# Altium PCB PCB.PcbDoc (part 1 of 2)
Units mm, origin at the board's own origin, x right, y up, seen from the top; angles counter-clockwise.
Board outline 51.3 x 20.05 mm, 4 copper layers (Top Layer, Power Layer, GND Layer, Bottom Layer), stack 1.536 mm thick; 81 components, 59 nets, 315 pads, 114 vias.
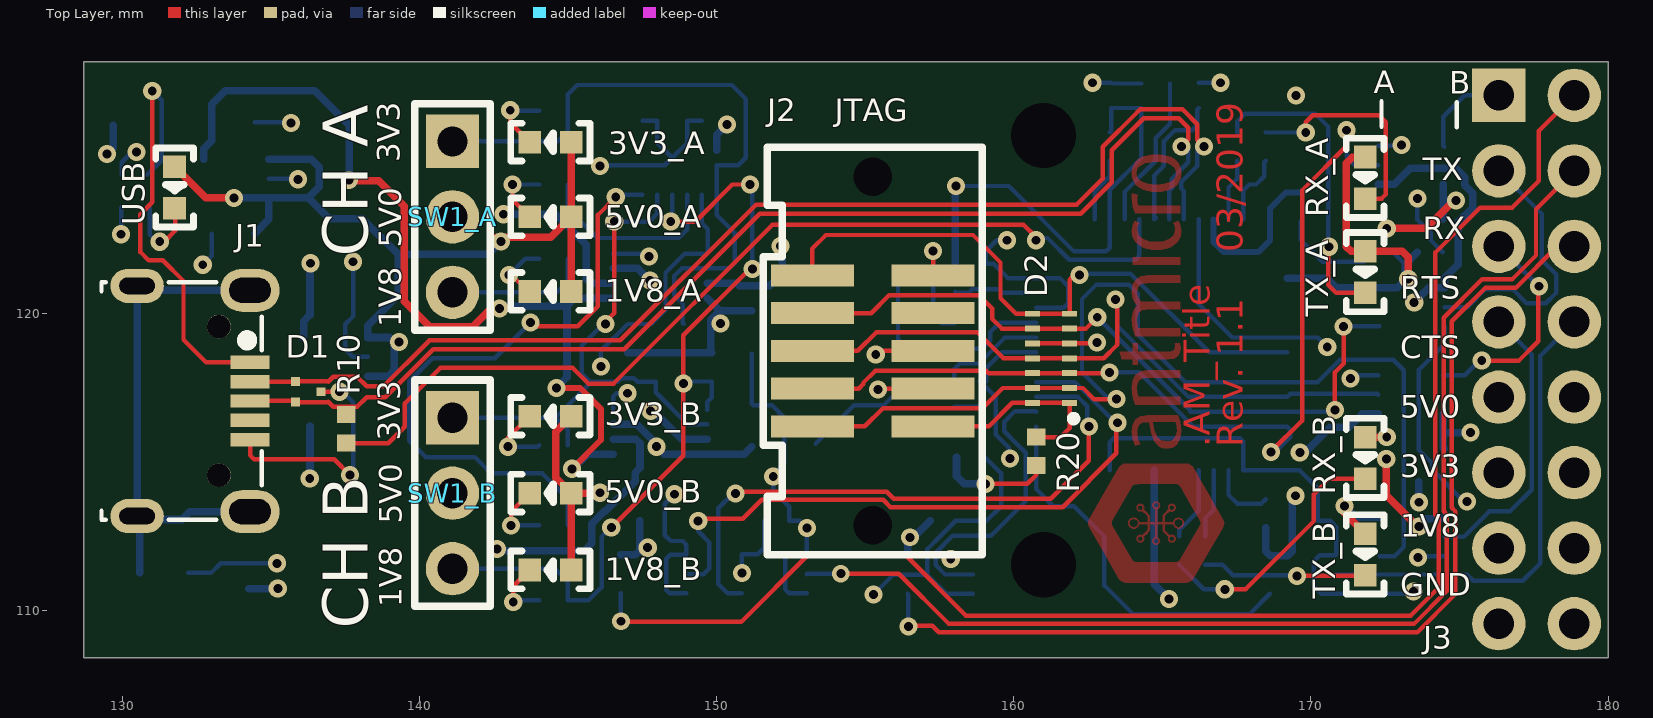
[diagram p0: Top Layer view]
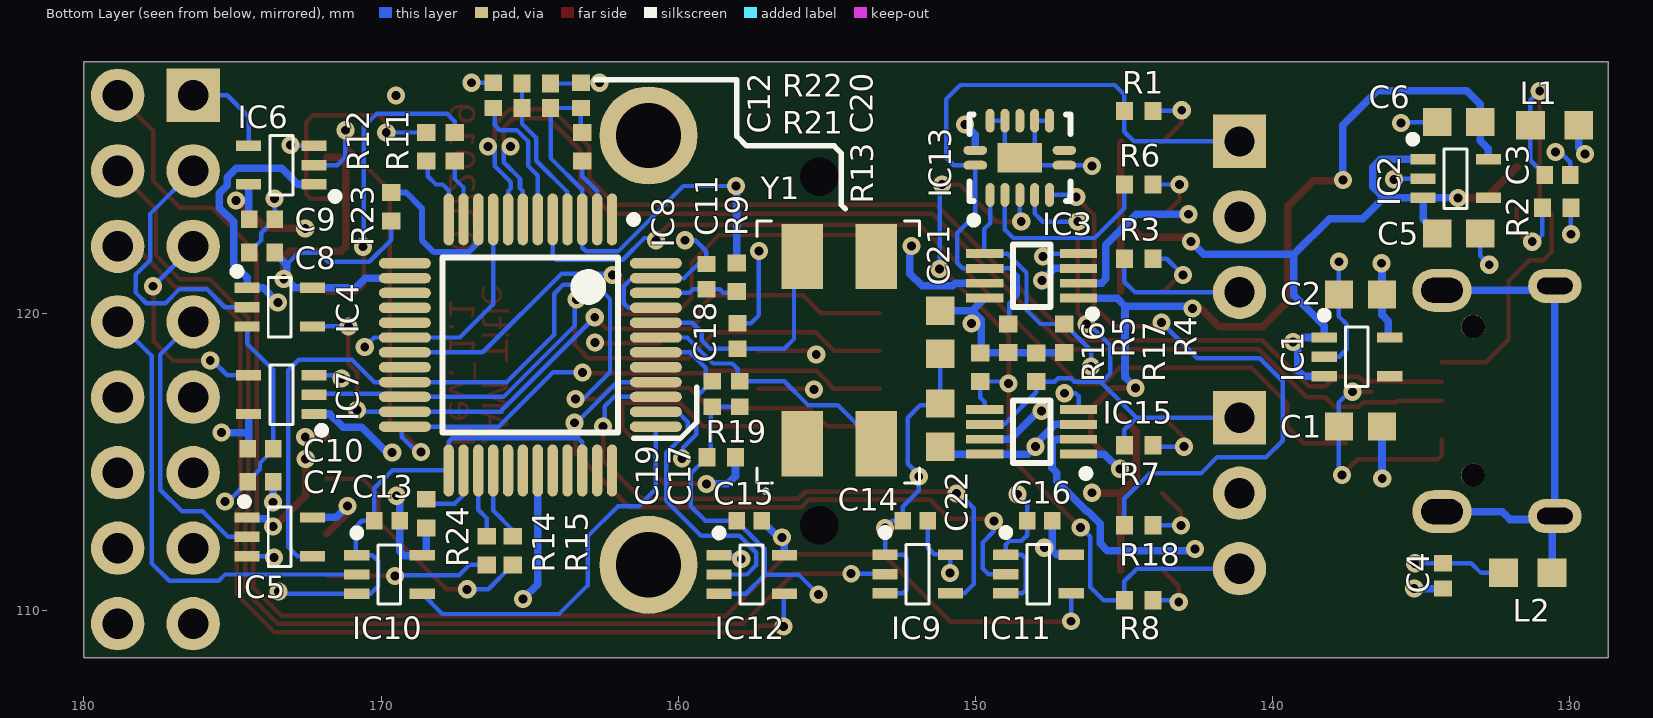
[diagram p1: Bottom Layer view, seen from below]
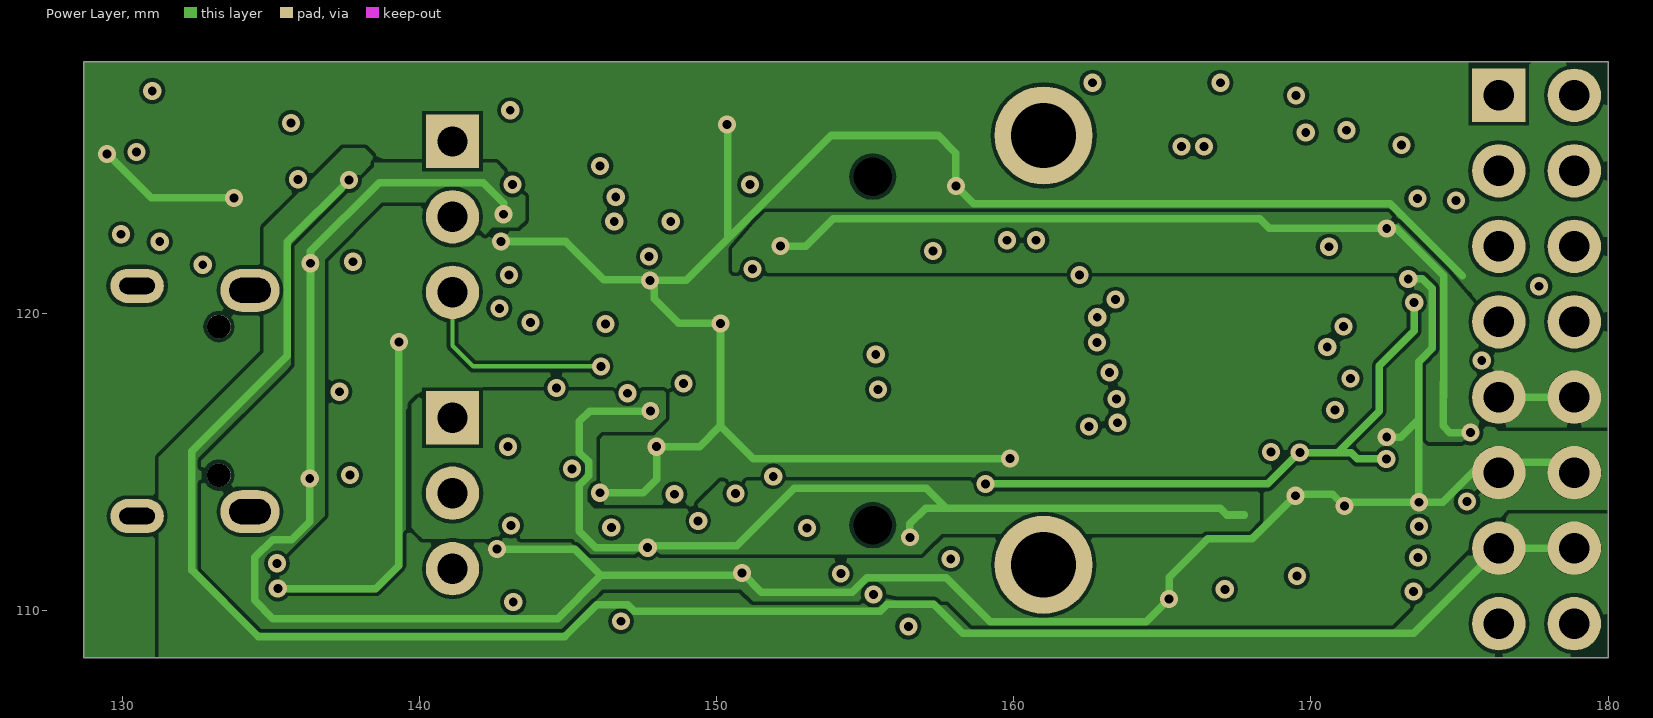
[diagram p2: Power Layer]
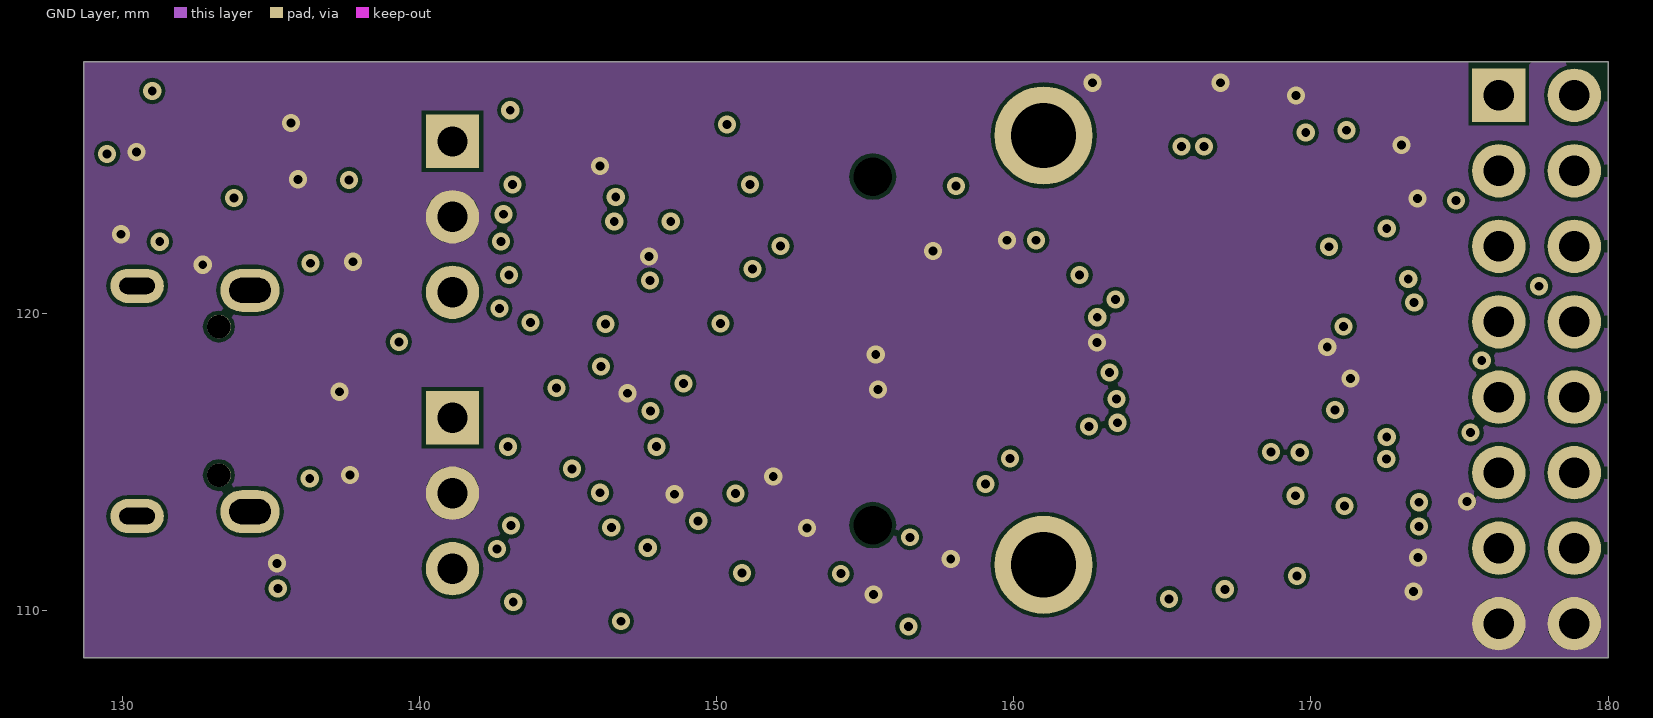
[diagram p3: GND Layer]
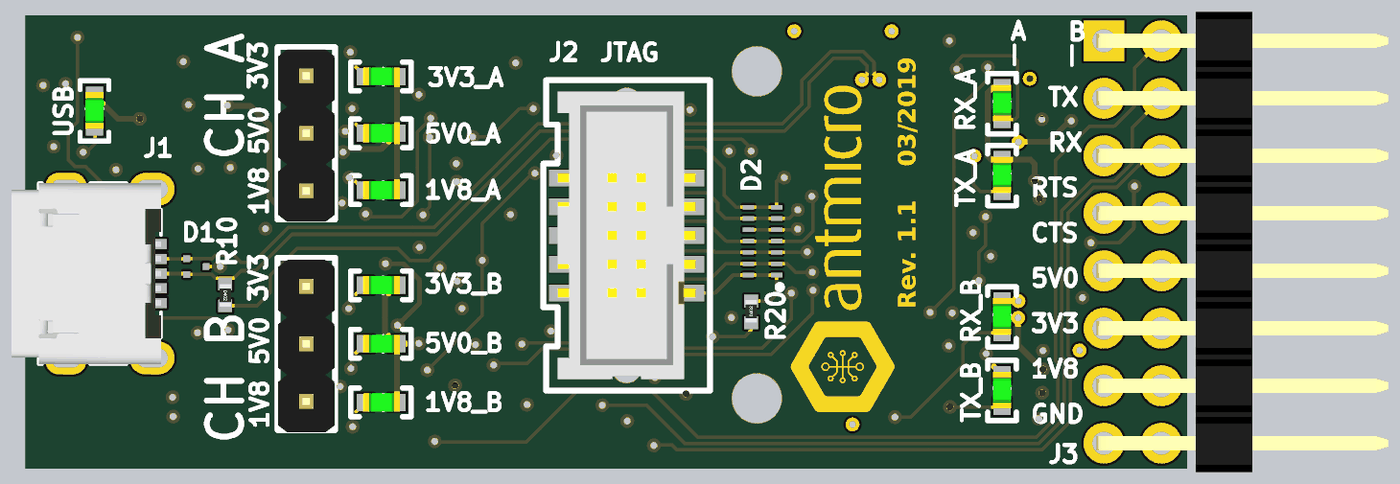
[diagram p5: 3D render of the assembled board from above, using the file's embedded part models]
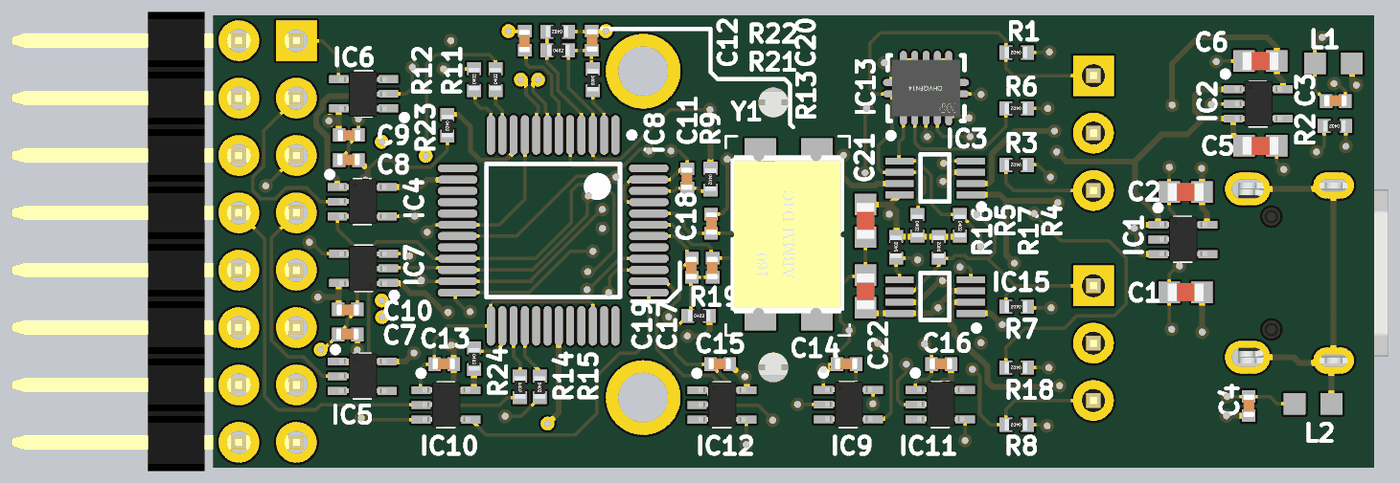
[diagram p6: 3D render of the assembled board from below, using the file's embedded part models]

## Layer stack, top to bottom
Top Solder: solder mask 0.01, Solder Resist, Dk 3.5
Top Layer: signal copper 0.035
Dielectric 1: prepreg 0.36, 7628MR, Dk 4.6
Power Layer: signal copper 0.018
Dielectric 2: core 0.71, FR+4, Dk 4.3
GND Layer: signal copper 0.018
Dielectric 3: prepreg 0.36, 7628MR, Dk 4.6
Bottom Layer: signal copper 0.035
Bottom Solder: solder mask 0.01, Solder Resist, Dk 3.5

## Board outline
128.7,108.425 180,108.425 180,128.475 128.7,128.475

## Design rules (kind name [scope] priority, off if disabled: settings)
Clearance [All] p1: gap=0.127
DiffPairsRouting [All] p1: maxlimit=0.152 minlimit=0.152 mostfreqgap=0.152 toplayer_minwidth=0.152 toplayer_maxwidth=0.152 toplayer_prefwidth=0.152 midlayer1_minwidth=0.152 midlayer1_maxwidth=0.152 midlayer1_prefwidth=0.152 midlayer2_minwidth=0.152 midlayer2_maxwidth=0.152 midlayer2_prefwidth=0.152 bottomlayer_minwidth=0.152 bottomlayer_maxwidth=0.152 bottomlayer_prefwidth=0.152 maxuncoupledlength=12.7
HoleSize [All] p1: absolutevalues=TRUE maxlimit=3.81 minlimit=0.25 maxpercent=80.000 minpercent=20.000
MinimumAnnularRing [All] p1: minimumring=0.15
MinimumSolderMaskSliver [All] p1: minsoldermaskwidth=0
PlaneClearance [All] p1: clearance=0.254
PlaneConnect [All] p1: planeconnectstyle=Direct reliefexpansion=0.508 reliefentries=4 reliefconductorwidth=0.254 reliefairgap=0.254
PolygonConnect [All] p1: connectstyle=Relief reliefconductorwidth=0.5 reliefentries=4 polygonreliefangle="90 Angle" airgapwidth=0
RoutingVias [All] p1: holewidth=0.3 width=0.61 viastyle="Through Hole" minholewidth=0.3 minwidth=0.61 maxholewidth=0.3 maxwidth=0.61
SilkToSilkClearance [All] p1: silktosilkclearance=0
SilkToSolderMaskClearance [IsPad] p1: minsilkscreentomaskgap=0 clearancetoexposedcopper=TRUE
SolderMaskExpansion ViaTenting [isVia] p1: expansion=-0.3
SolderMaskExpansion [All] p2: expansion=0.102
Width [All] p1: maxlimit=2 minlimit=0.15 preferedwidth=0.203
22 further rules are at their usual default settings.

## Classes and differential pairs
differential pair USB_D: +USB_D_P -USB_D_N

## Components (designator, comment, footprint, x,y, rotation, side; value= is the part's Value field where it differs from the comment)
1V8_A "KPT-1608SGC" LED0603 144.4,120.75 r180 top
1V8_B "KPT-1608SGC" LED0603 144.4,111.375 r180 top
3V3_A "KPT-1608SGC" LED0603 144.4,125.775 r180 top
3V3_B "KPT-1608SGC" LED0603 144.4,116.55 r180 top
5V0_A "KPT-1608SGC" LED0603 144.4,123.262 r180 top
5V0_B "KPT-1608SGC" LED0603 144.4,113.963 r180 top
C1 "1u" 0603#1 137.033,116.209 r180 bottom
C2 "1u" 0603#1 137.033,120.65 r180 bottom
C3 "10n" 0402#1 130.4,124.675 r180 bottom
C4 "100n" 0402#1 134.25,111.175 r270 bottom
C5 "1u" 0603#1 133.725,122.7 r0 bottom
C6 "1u" 0603#1 133.725,126.45 r180 bottom
C7 "100n" 0402#1 174.058,114.343 r180 bottom
C8 "100n" 0402#1 174.008,122.063 r180 bottom
C9 "100n" 0402#1 174.008,123.178 r0 bottom
C10 "100n" 0402#1 174.058,115.458 r0 bottom
C11 "100n" 0402#1 159.05,121.25 r90 bottom
C12 "100n" 0402#1 166.225,127.35 r90 bottom
C13 "100n" 0402#1 169.799,113.03 r180 bottom
C14 "100n" 0402#1 152.019,113.03 r180 bottom
C15 "100n" 0402#1 157.607,113.03 r180 bottom
C16 "100n" 0402#1 147.828,113.03 r180 bottom
C17 "27p" 0402#1 157.925,117.3 r90 bottom
C18 "27p" 0402#1 158,119.25 r270 bottom
C19 "100n" 0402#1 158.85,117.3 r90 bottom
C20 "100n" 0402#1 163.275,127.35 r270 bottom
C21 "100n" 0603#1 151.175,119.375 r90 bottom
C22 "100n" 0603#1 151.175,116.25 r270 bottom
D1 "TPD2E009DRTR" SOT-3 136.25,117.375 r270 top
D2 "TPD6E05U06" TPD6E05U06_PASS 161.25,118.5 r90 top
IC1 "TLV70033DCKT" SC70-5 138.25,119.2 r180 bottom
IC2 "TLV70018DCKT" SC70-5 134.925,125.2 r180 bottom
IC3 "TS5A3359" TS5A3359 148.1,121.275 r0 bottom
IC4 "SN74LV1T125DCKR" SC70-5 174.508,120.871 r180 bottom
IC5 "SN74LV1T125DCKR" SC70-5 174.508,113.143 r180 bottom
IC6 "SN74LV1T125DCKR" SC70-5 172.258,124.353 r0 bottom
IC7 "SN74LV1T125DCKR" SC70-5 172.258,116.625 r0 bottom
IC8 "FT2232D" LQFP-48 164.975,118.95 r270 bottom
IC9 "SN74LV1T125DCKR" SC70-5 153.035,111.887 r180 bottom
IC10 "SN74LV1T125DCKR" SC70-5 170.815,111.873 r180 bottom
IC11 "SN74LV1T125DCKR" SC70-5 148.971,111.887 r180 bottom
IC12 "SN74LV1T125DCKR" SC70-5 158.623,111.873 r180 bottom
IC13 "74HC00BQ" DHVQFN14 148.5,125.25 r90 bottom
IC15 "TS5A3359" TS5A3359 148.1,116.025 r0 bottom
J1 "629105150521" WE_629105150521 131.39,117.064 r270 top
J2 "SHF-105-01-L-D-SM" SHF-105-01-X-D-SM 155.25,118.75 r90 top
J3 "MH_2X08_2.54_RA" MH_2X08_2.54_RA 176.325,127.35 r270 top
L1 "BLM18SG121TN1D" 0603#2 130.5,126.35 r0 bottom
L2 "BLM18SG121TN1D" 0603#2 131.4,111.275 r180 bottom
R1 "220R" 0402#2 144.5,126.825 r0 bottom
R2 "470R" 0402#2 130.429,123.571 r0 bottom
R3 "220R" 0402#2 144.5,121.85 r0 bottom
R4 "10k" 0402#2 147,119.175 r270 bottom
R5 "10k" 0402#2 148.883,119.175 r270 bottom
R6 "220R" 0402#2 144.5,124.35 r0 bottom
R7 "220R" 0402#2 144.5,115.575 r0 bottom
R8 "220R" 0402#2 144.5,110.35 r0 bottom
R9 "470R" 0402#2 158.025,121.225 r270 bottom
R10 "1k54" 0402#2 137.525,116.125 r270 top
R11 "220R" 0402#2 167.525,125.625 r90 bottom
R12 "220R" 0402#2 168.475,125.625 r90 bottom
R13 "10k" 0402#2 163.225,125.625 r270 bottom
R14 "220R" 0402#2 166.448,112.03 r270 bottom
R15 "220R" 0402#2 165.573,112.03 r270 bottom
R16 "10k" 0402#2 149.825,118.2 r90 bottom
R17 "10k" 0402#2 147.942,118.2 r90 bottom
R18 "220R" 0402#2 144.5,112.875 r0 bottom
R19 "10k" 0402#2 158.55,115.175 r180 bottom
R20 "0R" 0402#2 160.75,115.375 r90 top
R21 "4k7" 0402#2 164.775,126.925 r180 bottom
R22 "10k" 0402#2 164.775,127.75 r0 bottom
R23 "0R" 0402#2 169.65,123.6 r270 bottom
R24 "0R" 0402#2 168.475,113.275 r270 bottom
RX_A "KPT-1608SGC" LED0603 171.825,124.575 r270 top
RX_B "KPT-1608SGC" LED0603 171.825,115.15 r270 top
SW1_A "MH_1X03_2.54" MH_1X03_2.54 141.105,125.8 r270 top
SW1_B "MH_1X03_2.54" MH_1X03_2.54 141.105,116.5 r270 top
TX_A "KPT-1608SGC" LED0603 171.825,121.4 r270 top
TX_B "KPT-1608SGC" LED0603 171.825,111.9 r270 top
USB "KPT-1608SGC" LED0603 131.75,124.25 r270 top
Y1 "MQ-6.000-12-30/30/" Crystal_5x7mm 155.825,115.625 r90 bottom

## Footprints (in the part's own frame and the unit in brackets; to place one, negate y for a bottom-side part, rotate by r counter-clockwise, add the part's x,y. Pads: shape width x height; smd on the part's side, far side on the other; paste and mask are expansions set on the pad)
0402#1 [mm]
  rect 0.55x0.6 smd: 1(-0.425,0) 2(0.425,0)
  body extent -0.51,-0.23 0.5,0.27, height 0.49
0402#2 [mm]
  rect 0.57x0.62 smd: 1(-0.48,0) 2(0.48,0)
  body extent -0.47,-0.25 0.53,0.25, height 0.35
0603#1 [mm]
  rect 0.95x0.95 smd: 1(-0.725,0) 2(0.725,0)
  body extent -0.8,-0.4 0.8,0.4, height 0.45
0603#2 [mm] "Chip Inductor Ferrite Bead 0603"
  rect 0.97x0.96 smd: 1(-0.815,0) 2(0.815,0)
  body extent -0.87,-0.48 0.87,0.47, height 0.6
Crystal_5x7mm [mm]
  rect 2.2x1.4 smd: 1(0,-2.5) 2(6.3,-2.5) 3(6.3,0) 4(0,0)
  silkscreen extent -1.67,-3.95 7.5,1.53, body extent -0.35,-3.7 6.65,1.3, height 1.45
DHVQFN14 [mm] "QFN, 14-Leads, Body 2.50x3.00mm, Pitch 0.50mm, Thermal Pad 1.00x1.50mm, IPC Medium Density"
  oval 0.3x0.8 smd: 1(-0.25,1.5) 7(-0.25,-1.5) 8(0.25,-1.5) 14(0.25,1.5)
  oval 0.8x0.3 smd: 2(-1.25,1) 3(-1.25,0.5) 4(-1.25,0) 5(-1.25,-0.5) 6(-1.25,-1) 9(1.25,-1) 10(1.25,-0.5) 11(1.25,0) 12(1.25,0.5) 13(1.25,1)
  rect 1x1.5 smd: 15(0,0)
  silkscreen extent -2.22,-1.7 1.45,1.7, body extent -1.25,-1.5 1.25,1.5, height 0.85
LED0603 [mil]
  rect 30x30 smd: A(-27.5,0) K(27.5,0)
  silkscreen extent -52,-25 52,25, body extent -33,-16 31,16, height 43
LQFP-48 [mm] "LQFP-48, 48-Leads, Body 7.25x7.25mm, Pitch 0.50mm, IPC Medium Density"
  oval 1.75x0.35 smd: 1(-4.225,2.75) 2(-4.225,2.25) 3(-4.225,1.75) 4(-4.225,1.25) 5(-4.225,0.75) 6(-4.225,0.25) 7(-4.225,-0.25) 8(-4.225,-0.75) 9(-4.225,-1.25) 10(-4.225,-1.75) 11(-4.225,-2.25) 12(-4.225,-2.75) 25(4.225,-2.75) 26(4.225,-2.25) 27(4.225,-1.75) 28(4.225,-1.25) 29(4.225,-0.75) 30(4.225,-0.25) 31(4.225,0.25) 32(4.225,0.75) 33(4.225,1.25) 34(4.225,1.75) 35(4.225,2.25) 36(4.225,2.75)
  oval 0.35x1.75 smd: 13(-2.75,-4.225) 14(-2.25,-4.225) 15(-1.75,-4.225) 16(-1.25,-4.225) 17(-0.75,-4.225) 18(-0.25,-4.225) 19(0.25,-4.225) 20(0.75,-4.225) 21(1.25,-4.225) 22(1.75,-4.225) 23(2.25,-4.225) 24(2.75,-4.225) 37(2.75,4.225) 38(2.25,4.225) 39(1.75,4.225) 40(1.25,4.225) 41(0.75,4.225) 42(0.25,4.225) 43(-0.25,4.225) 44(-0.75,4.225) 45(-1.25,4.225) 46(-1.75,4.225) 47(-2.25,4.225) 48(-2.75,4.225)
  silkscreen extent -4.35,-2.95 2.95,3.6, body extent -3.65,-3.65 3.65,3.65, height 1.6
MH_1X03_2.54 [mm]
  rect 1.8x1.8 hole 1.02: 1(0,0)
  round 1.8 hole 1.02: 2(2.54,0) 3(5.08,0)
  silkscreen extent -1.27,-1.27 6.35,1.27, body extent -1.17,-1.25 6.45,1.25, height 8.33
MH_2X08_2.54_RA [mm]
  rect 1.8x1.8 hole 1.02: 1(0,0)
  round 1.8 hole 1.02: 2(0,2.54) 3(2.54,0) 4(2.54,2.54) 5(5.08,0) 6(5.08,2.54) 7(7.62,0) 8(7.62,2.54) 9(10.16,0) 10(10.16,2.54) 11(12.7,0) 12(12.7,2.54) 13(15.24,0) 14(15.24,2.54) 15(17.78,0) 16(17.78,2.54)
  body extent -1.27,-0.32 19.05,12.56, height 2.45
SC70-5 [mm] "SC70, 5-Leads, Pitch 0,65mm, EIAJ SC-88a"
  rect 0.85x0.35 smd: 1(0,0) 2(0,-0.65) 3(0,-1.3) 4(2.2,-1.3) 5(2.2,0)
  silkscreen extent -0.13,-1.65 1.47,0.87, body extent 0.07,-1.63 2.17,0.37, height 0.96
SHF-105-01-X-D-SM [mil]
  round 0 hole 51.18: 0(-231,0) 0(230.98,0)
  rect 29x110 smd mask+2: 1(-100,-80) 2(-100,80) 3(-50,-80) 4(-50,80) 5(0,-80) 6(0,80) 7(50,-80) 8(50,80) 9(100,-80) 10(100,80)
  silkscreen extent -270,-145 270,145, body extent -250,-120 250,120, height 210
SOT-3 [mm]
  rect 0.3x0.3 smd: 1(-0.35,-0.425) 2(0.35,-0.425) 3(0,0.425)
  body extent -0.51,-0.38 0.51,0.38, height 0.51
TPD6E05U06_PASS [mm]
  rect 0.2x0.5 smd: 5(0.5,-0.625) 8(1.5,-0.625) 8(1.5,0.625) 9(1,-0.625) 9(1,0.625) 10(0.5,0.625) 11(0,0.625) 11(0,-0.625) 12(-0.5,-0.625) 12(-0.5,0.625) 13(-1,-0.625) 13(-1,0.625) 14(-1.5,-0.625) 14(-1.5,0.625)
  silkscreen extent -2.13,-0.86 -1.93,-0.66, body extent -1.88,-0.63 1.93,0.64, height 0.6
TS5A3359 [mm]
  rect 1.25x0.3 smd: 1(-1.579,0.75) 2(-1.579,0.25) 3(-1.579,-0.25) 4(-1.579,-0.75) 5(1.579,-0.75) 6(1.579,-0.25) 7(1.579,0.25) 8(1.579,0.75)
  silkscreen extent -2.17,-1.05 0.64,1.4, body extent -1.2,-1.05 1.2,1.05, height 0.9
WE_629105150521 [mm] "Micro USB 2.0 SMT Type B Horizontal 5 Contacts High Current"
  rect 0.45x1.3 smd: 1(-1.3,2.9) 2(-0.65,2.9) 3(0,2.9) 4(0.65,2.9) 5(1.3,2.9)
  oval 1.15x1.8 hole 0.55 slot 1.2 at 90 deg: S(-3.875,-0.9) S(3.875,-0.9)
  oval 1.45x2 hole 0.85 slot 1.4 at 90 deg: S(-3.725,2.9) S(3.725,2.9)
  round 0.8 hole 0.8 unplated: ""(-2.5,1.85) ""(2.5,1.85)
  silkscreen extent -4,-2.1 4,3.3, body extent -4,-3.3 4,3.3, height 2.71

## Part data
1V8_A 1V8_B 3V3_A 3V3_B 5V0_A 5V0_B RX_A RX_B TX_A TX_B USB: library part LED_G, "LED Green 0603 case"
C1 C2 C5 C6: library part C_1u_0603, "MLCC SMT Capacitor 1uF 0603"
C3: library part C_10n_0402, "MLCC SMT Capacitor 10nF 0402"
C4 C7 C8 C9 C10 C11 C12 C13 C14 C15 C16 C19 C20: library part C_100n_0402, "MLCC SMT Capacitor 100nF 0402"
C17 C18: library part C_27p_0402, "MLCC SMT Capacitor 27pF 0402"
C21 C22: library part C_100n_0603, "MLCC SMT Capacitor 100nF 0603"
D1: "ESD Suppressors 2-CH"
D2: library part TPD6E05U06_PASS, "ESD Suppressors 6-CH Pass through layout"
IC1: "Voltage Regulator, 2V to 5.5V, 175mV Dropout, 3.3Vout, 200mAout"
IC2: "Voltage Regulator, 2V to 5.5V, 175mV Dropout, 1.8Vout, 200mAout"
IC3 IC15: "Analogue Switch, SP3T, 1 Channels, 0.9 ohm, 1.65V to 5.5V, VSSOP, 8 Pins"
IC4 IC5 IC6 IC7 IC9 IC10 IC11 IC12: "Buffer, 74LV1T125, 1.6 V to 5.5 V, SOT-23-5"
IC8: "Dual USB-UART/FIFO"
IC13: "2 NAND Gate, 4 channel"
J1: library part WE_629105150521, "Micro USB B"
J2: "10 Positions Header Connector 0.050\" (1.27mm) Surface Mount Gold"
J3: "Male header, 2 x 08 pins, pitch 2.54 mm, right angle"
L1 L2: "FERRITE BEAD, 0.025OHM, 3A, 0603"
R1 R3 R6 R7 R8 R11 R12 R14 R15 R18: library part R_220R_0402, "SMT Resistor 220R 0402"
R2 R9: library part R_470R_0402, "SMT Resistor 470R 0402"
R4 R5 R13 R16 R17 R19 R22: library part R_10k_0402, "SMT Resistor 0402"
R10: library part R_1k54_0402, "SMT Resistor 1k54 0402"
R20 R23 R24: library part R_0R_0402, "SMT Resistor 0402"
R21: library part R_4k7_0402, "SMT Resistor 4k7 0402"
SW1_A SW1_B: "Male header, 1 x 03 pins, pitch 2.54 mm"
Y1: library part CRYSTAL_6_MHz_SMD, "CRYSTAL, 6MHZ, 12PF, SMD,30ppm"

## Free pads (board coordinates)
  round 0 / inner round 3.3 / far side round 3.3 hole 2.2: M(161,111.55) M(161,126)

## Via types
v1: diameter 0.61, hole 0.3, Top Layer to Bottom Layer, tented both sides, 100 vias
v2: diameter 0.61, hole 0.3, Top Layer to Bottom Layer, 11 vias
v3: diameter 0.6, hole 0.3, Top Layer to Bottom Layer, tented both sides, 3 vias

## Nets (pads, with @x,y where several pads share a name; then routed paths per layer and width w, separated by ;. In a path a pad name is that pad's centre, name@x,y a point inside that pad or via, vN(x,y) a via of type N, cw(c..) or ccw(c..) an arc to the next point about the centre after c; other vN are vias at no path point)
1V8: C6.2 IC2.5 IC3.1 IC15.1 J3.13 J3.14 | length 96.1
  Top Layer w0.2: v1(144.6,117.5) 145.4,117.5 146.1,116.8 146.1,115.749 v1(145.132,114.781)
  Top Layer w0.254: v1(137.625,124.5) 137.65,124.475 138.625,124.475 139.475,123.625 139.475,120.425 140.334,119.566 141.791,119.566 142.406,120.181 v1(142.682,120.181) ; v1@145.099,114.814 v1(145.132,114.781)
  Power Layer w0.254: v1(137.625,124.5) 135.55,122.425 135.55,122.375 135.544,122.369 135.544,118.594 132.325,115.375 132.325,111.375 134.575,109.125 144.875,109.125 145.954,110.204 147.004,110.204 147.217,109.991 155.507,109.991 155.741,110.225 157.3,110.225 158.275,109.25 173.465,109.25 J3.13@176.325,112.11 J3.14@178.865,112.11
  Bottom Layer w0.254: IC2.5@132.725,125.2 132.725,125.55 133,125.825 C6.2@133,126.45 133,127.05 133.45,127.5 136.475,127.5 137.625,126.35 v1(137.625,124.5) ; v1(142.682,120.181) 142.76,120.259 144.959,120.259 ; v1(144.6,117.5) 144.959,117.859 144.959,120.259 ; v1(145.132,114.781) 145.156,114.781 145.65,115.275 IC15.1@146.521,115.275 ; IC3.1@146.521,120.525 145.225,120.525 144.959,120.259
3V3_FT: C1.2 C2.2 C7.2 C8.2 C13.2 C14.2 IC1.5 IC3.2 IC4.5 IC5.5 IC8.14 IC8.31 IC9.5 IC10.5 IC15.2 J3.11 J3.12 R23.2 R24.2 RX_A.A RX_B.A TX_A.A TX_B.A | length 133.2
  Top Layer w0.254: v1@142.825,123.348 v1(142.825,123.35) ; v1(171.125,113.525) 171.125,113.298 TX_B.A@171.825,112.598 ; RX_B.A@171.825,115.849 172.549,115.849 v2(172.55,115.85) ; RX_A.A@171.825,125.274 171.399,125.274 171.19,125.065 171.19,122.26 171.352,122.098 TX_A.A@171.825,122.098 173.077,122.098 173.275,121.9 v1(173.275,121.175)
  Power Layer w0.254: v1(142.6,112.075) 145.225,112.075 146.1,111.2 ; v1(142.825,123.35) 142.825,123.725 142.136,124.414 138.639,124.414 136.325,122.1 v1(136.325,121.7) 136.325,114.475 v1(136.3,114.45) 136.3,113 135.7,112.4 135.05,112.4 134.45,111.8 134.45,110.35 135.059,109.741 144.641,109.741 146.1,111.2 ; v2(172.55,115.85) 173.025,115.85 173.625,116.45 ; v1(173.275,121.175) 173.75,121.175 174.084,120.841 174.084,118.843 173.625,118.384 173.625,116.45 ; v1(173.633,113.656) 173.631,113.656 v1@173.625,113.65 ; J3.12@179,115 175.784,115 174.434,113.65 v1@173.625,113.65 ; 146.1,111.2 150.775,111.2 v1(150.85,111.275) 151.5,110.625 154.559,110.625 155.043,111.109 157.725,111.109 159.203,109.631 164.456,109.631 v2(165.225,110.4) 165.225,111.125 166.525,112.425 168.025,112.425 v1(169.475,113.875) 169.525,113.925 170.725,113.925 v1(171.125,113.525) 171.25,113.65 v1@173.625,113.65 ; v1@173.625,113.65 173.625,116.45
  Bottom Layer w0.15: v1(150.85,111.275) 150.835,111.29 IC9.5@150.835,111.887 150.848,111.9 151.375,111.9 151.594,112.119 C14.2@151.594,113.03
  Bottom Layer w0.152: R23.2@169.65,123.12 169.65,122.496 170.398,121.748 171.773,121.748 172.075,122.05 172.78,122.05 173.175,121.655
  Bottom Layer w0.254: IC1.5@136.05,119.2 136.1,119.25 136.1,119.75 136.308,119.958 C2.2@136.308,120.65 136.308,121.683 v1(136.325,121.7) ; v1(136.3,114.45) 136.308,114.458 C1.2@136.308,116.209 ; v1(142.6,112.075) 142.65,112.025 145.55,112.025 145.796,112.271 145.796,112.937 146.218,113.359 146.25,113.359 147.25,114.359 147.25,114.65 147.416,114.816 147.416,115.634 147.275,115.775 IC15.2@146.521,115.775 ; v1(142.825,123.35) 144.575,123.35 145.6,122.325 145.6,121.175 145.75,121.025 IC3.2@146.521,121.025 ; IC8.31@164.725,114.725 164.725,110.9 v2(165.225,110.4) ; R24.2@168.475,112.795 168.475,112.013 IC10.5@168.615,111.873 168.638,111.85 169.225,111.85 169.374,111.999 C13.2@169.374,113.03 169.374,113.774 v1(169.475,113.875) ; IC8.14@169.2,121.2 170.525,121.2 170.854,120.871 IC4.5@172.308,120.871 172.896,120.871 173.175,121.15 173.175,121.655 C8.2@173.583,122.063 ; v1(171.125,113.525) 171.507,113.143 IC5.5@172.308,113.143 ; v1(173.633,113.656) 173.631,113.656 173.633,113.658 C7.2@173.633,114.343
5V_USB: 1V8_A.A 1V8_B.A 3V3_A.A 3V3_B.A 5V0_A.A 5V0_B.A C4.2 C5.2 C19.2 C20.2 C21.2 C22.2 IC1.1 IC1.3 IC2.1 IC2.3 IC3.3 IC3.8 IC8.3 IC8.42 IC13.14 IC15.3 IC15.8 J3.9 J3.10 L1.1 R4.2 R5.2 R9.1 R13.1 R16.2 R17.2 R21.2 USB.A | length 156.8
  Top Layer w0.254: USB.A@131.75,124.949 132.798,123.9 v1(133.75,123.9) ; v1@142.6,122.575 144.411,122.575 5V0_A.A@145.099,123.262 ; 1V8_B.A@145.099,111.375 5V0_B.A@145.099,113.963 ; 3V3_B.A@145.099,116.55 144.573,116.025 144.573,114.488 5V0_B.A@145.099,113.963 ; 1V8_A.A@145.099,120.75 5V0_A.A@145.099,123.262 ; 3V3_A.A@145.099,125.775 5V0_A.A@145.099,123.262 ; v1(146.075,113.975) 146.063,113.963 5V0_B.A@145.099,113.963
  Power Layer w0.254: v1(129.481,125.381) 130.962,123.9 v1(133.75,123.9) ; v1(135.225,110.75) 138.525,110.75 139.3,111.525 v1(139.3,119.05) ; v1(142.732,122.431) 144.919,122.431 146.2,121.15 147.725,121.15 v1(147.75,121.125) 148.975,121.125 150.375,122.525 ; v1(146.075,113.975) 147.525,113.975 147.975,114.425 v1(147.975,115.525) 149.425,115.525 150.125,116.225 ; v1@147.9,121.125 147.9,120.5 148.725,119.675 v1(150.125,119.675) 150.125,116.225 ; v1(150.35,126.375) 150.375,126.35 150.375,122.525 ; v1(159.875,115.125) 151.225,115.125 150.125,116.225 ; 175.1,121.275 172.675,123.7 158.65,123.7 v1(158.05,124.3) 158.05,125.4 157.45,126 153.85,126 150.375,122.525 ; J3.9@176.325,117.19 J3.10@178.865,117.19
  Bottom Layer w0.15: v1(158.05,124.3) 159.825,124.3 162.027,122.098 163.098,122.098 163.225,122.225 IC8.3@163.225,123.175 163.225,124.175 164.295,125.245 R21.2@164.295,126.925 C20.2@163.275,126.925 163.275,126.155 R13.1@163.225,126.105 ; C19.2@158.85,117.725 158.861,117.725 159.396,117.19 159.396,115.929 159.825,115.5 159.825,115.1 159.85,115.1 v1(159.875,115.125) ; C19.2@159.075,117.725 159.075,118.175 159.6,118.7 IC8.42@160.75,118.7
  Bottom Layer w0.254: v1@129.685,125.585 L1.1@129.685,126.35 ; v1(133.75,123.9) IC2.3@134.925,123.9 ; C4.2@134.25,110.75 v1(135.225,110.75) ; C5.2@134.45,122.7 134.925,123.175 IC2.3@134.925,123.9 ; IC2.1@134.925,125.2 136.35,125.2 136.625,124.925 136.625,124.275 136.25,123.9 ; IC1.3@138.25,117.9 138.95,117.9 139.15,118.1 v1@139.15,119.025 ; v1(139.3,119.05) 139.275,119.025 v1@139.15,119.025 ; v1(142.732,122.431) 142.301,122 139.275,122 ; IC15.3@146.521,116.275 147.314,116.275 v1@147.975,115.614 ; IC3.3@146.521,121.525 147.334,121.525 147.493,121.366 147.509,121.366 v1(147.75,121.125) ; R4.2@147,118.695 147.015,118.68 R17.2@147.942,118.68 R16.2@149.825,118.68 149.8,118.705 149.8,119.796 150.104,120.1 ; 148.225,115.275 IC15.8@149.679,115.275 150.925,115.275 C22.2@151.175,115.525 ; IC3.8@149.679,120.525 150.104,120.1 ; IC13.14@150,125.5 150,126.025 v1(150.35,126.375) ; C21.2@151.175,120.1 150.104,120.1 ; R9.1@158.025,121.705 158.025,124.275 v1(158.05,124.3) ; IC2.3@134.925,123.9 136.25,123.9 ; 136.25,123.9 136.95,123.2 138.075,123.2 139.275,122 ; v1@139.15,119.025 138.975,119.2 IC1.1@138.25,119.2 138.25,119.6 139.275,120.625 139.275,122
CN_JTAG_RESETN: D2.8 IC8.19 J2.10 | length 20.9
  Top Layer w0.15: J2.10@153.218,121.29 153.218,122.193 153.675,122.65 158.625,122.65 159.55,121.725 159.55,120.525 160.075,120 D2.8@160.625,120 D2.8@161.875,120 161.875,121.15 162.05,121.325 162.2,121.325 162.208,121.317 v1(162.208,121.306)
  Bottom Layer w0.15: v1@162.5,121.35 163.925,121.35 166.575,118.7 IC8.19@169.2,118.7
FTDI_RST: IC8.4 R21.1 R22.2 | length 5.2
  Bottom Layer w0.15: IC8.4@163.725,123.175 163.725,124.1 164.773,125.148 164.773,125.915 165.255,126.397 R21.1@165.255,126.925 R22.2@165.255,127.75
GND: C1.1 C2.1 C3.2 C4.1 C5.1 C6.1 C7.1 C8.1 C9.1 C10.1 C11.2 C12.2 C13.1 C14.1 C15.1 C16.1 C17.1 C18.1 C19.1 C20.1 C21.1 C22.1 D1.3 D2.5 D2.10 IC1.2 IC2.2 IC3.4 IC4.3 IC5.3 IC6.3 IC7.3 IC8.9 IC8.18 IC8.25 IC8.34 IC8.45 IC8.47 IC9.1 IC9.3 IC10.1 IC10.3 IC11.1 IC11.3 IC12.1 IC12.3 IC13.7 IC13.9 IC13.10 IC13.12 IC13.13 IC13.15 IC15.4 J1.5 J2.3 J2.5 J2.9 J3.15 J3.16 L2.1 R2.1 R19.1 R22.1 SW1_A.2 SW1_B.2 | length 114.1
  Top Layer w0.15: J1.5@134.29,115.764 134.29,115.235 134.425,115.1 137.125,115.1 v1(137.65,114.575) ; D1.3@136.675,117.375 v1(137.3,117.375) ; v1(155.35,118.625) 155.475,118.75 J2.5@157.282,118.75 ; v1(155.433,117.456) 155.433,117.383 155.53,117.48 J2.3@157.282,117.48 ; J2.9@157.282,121.29 v1(157.283,122.106) ; D2.10@160.625,119 D2.5@161.875,119 162.766,119 v1(162.8,119.034)
  Bottom Layer w0.15: v1(129.95,122.675) 129.949,122.676 R2.1@129.949,123.571 R2.1@129.975,123.597 ; C3.2@129.975,124.675 129.975,125.1 130.325,125.45 v1(130.475,125.45) ; L2.1@132.215,111.275 132.975,111.275 133.3,111.6 C4.1@134.25,111.6 v1(135.2,111.6) ; v1(132.7,121.65) 133,121.95 C5.1@133,122.7 ; C6.1@134.45,126.45 135.65,126.45 v1(135.675,126.425) ; IC2.2@134.925,124.55 135.875,124.55 v1(135.9,124.525) ; v1(137.3,117.375) 137.4,117.375 137.758,117.017 C1.1@137.758,116.209 137.758,114.683 v1(137.65,114.575) ; v1(137.75,121.75) 137.758,121.742 C2.1@137.758,120.65 137.758,119.908 137.5,119.65 137.5,118.8 137.75,118.55 IC1.2@138.25,118.55 ; v1(146.075,124.975) 146.1,125 IC13.7@147,125 148.25,125 IC13.15@148.5,125.25 ; IC15.4@146.521,116.775 146.521,117.221 146.625,117.325 v1(147,117.325) ; IC3.4@146.521,122.025 147.625,122.025 v1(147.725,121.925) ; IC13.9@147.5,126.5 IC13.10@148,126.5 148,125.75 IC13.15@148.5,125.25 ; 148.412,110.587 IC11.3@148.971,110.587 ; 148.412,110.588 148.3,110.7 148.3,111.75 148.437,111.887 IC11.1@148.971,111.887 148.971,112.229 148.85,112.35 148.45,112.35 148.253,112.547 C16.1@148.253,113.03 148.253,113.603 v1(148.575,113.925) ; IC13.13@149.5,126.5 IC13.12@149,126.5 149,125.75 IC13.15@148.5,125.25 ; C21.1@151.175,118.65 C22.1@151.175,116.975 151.225,116.925 151.85,116.925 152.275,116.5 152.275,114.95 151.9,114.575 v1(151.9,114.525) 151.9,114.05 152.444,113.506 C14.1@152.444,113.03 152.795,113.03 v1(153.035,112.79) IC9.1@153.035,111.887 152.412,111.887 152.3,111.775 152.3,110.725 152.438,110.587 IC9.3@153.035,110.587 ; v1(155.275,110.55) 155.934,111.209 157.091,111.209 ; v1@157.369,122.192 v1(157.283,122.106) 157.283,119.942 157.55,119.675 C18.1@158,119.675 ; v1(157.875,111.75) 157.998,111.873 IC12.1@158.623,111.873 ; C17.1@158,116.875 158.9,116.875 158.9,115.305 R19.1@159.03,115.175 159.03,115.17 159.575,114.625 159.575,113.525 159.08,113.03 C15.1@158.032,113.03 158.032,113.019 157.69,112.677 157.685,112.677 157.659,112.651 157.659,112.646 157.541,112.528 157.536,112.528 157.091,112.083 157.091,111.209 ; IC12.3@158.623,110.573 157.727,110.573 157.091,111.209 ; v1(159.775,122.475) 159.425,122.475 159.05,122.1 C11.2@159.05,121.675 159.325,121.675 159.8,121.2 IC8.47@160.75,121.2 161.55,121.2 161.827,120.923 161.827,120.352 161.675,120.2 IC8.45@160.75,120.2 ; v2(162.65,127.775) C20.1@163.275,127.775 163.3,127.75 R22.1@164.295,127.75 ; IC8.34@163.225,114.725 163.225,115.675 163.352,115.802 167.623,115.802 167.725,115.7 IC8.25@167.725,114.725 169.625,114.725 170.224,114.126 C13.1@170.224,113.03 170.645,113.03 170.85,112.825 170.85,111.908 IC10.1@170.815,111.873 170.298,111.873 170.1,111.675 170.1,110.825 170.352,110.573 IC10.3@170.815,110.573 173.373,110.573 v1(173.45,110.65) ; IC8.9@166.225,123.175 166.225,121.05 166.225,120.325 167.35,119.2 IC8.18@169.2,119.2 170.225,119.2 v1(170.55,118.875) ; C12.2@166.225,127.775 v2(166.95,127.775) ; v1(171.325,117.825) 171.425,117.925 IC7.3@172.258,117.925 ; IC6.3@172.258,125.653 173.028,125.653 v2(173.05,125.675) ; v1(173.583,123.883) 173.65,123.95 173.475,123.95 173.583,123.842 C9.1@173.583,123.178 173.583,123.167 174.025,122.725 174.025,122.482 174.433,122.074 C8.1@174.433,122.063 ; v1(173.6,111.8) 173.643,111.843 IC5.3@174.508,111.843 ; IC4.3@174.508,119.571 174.508,118.983 173.633,118.108 C10.1@173.633,115.458 173.633,115.417 174.075,114.975 174.075,114.762 174.483,114.354 C7.1@174.483,114.343 175.151,113.675 v2(175.25,113.675)
  other v1: 169.5,127.35
IN1_A: IC3.6 IC13.1 R1.2 R5.1 SW1_A.1 | length 22.1
  Bottom Layer w0.15: SW1_A.1@141.105,125.8 144.65,125.8 144.98,126.13 R1.2@144.98,126.825 144.98,127.38 145.3,127.7 150.5,127.7 150.975,127.225 150.975,125.25 150.725,125 IC13.1@150,125 150,123.325 150.6,122.725 150.6,121.7 150.425,121.525 IC3.6@149.679,121.525 148.825,121.525 148.575,121.275 148.575,120.625 148.852,120.348 148.852,119.686 R5.1@148.883,119.655
IN1_B: IC13.5 IC15.6 R7.2 R17.1 SW1_B.1 | length 19.4
  Top Layer w0.15: v1(146.257,119.656) 146.257,119.731 146.55,120.024 v1(146.55,123.1)
  Bottom Layer w0.15: SW1_B.1@141.105,116.5 144.575,116.5 ; R7.2@144.98,115.575 144.98,116.095 144.575,116.5 ; 145.795,117.72 145.797,117.718 146.676,117.718 146.79,117.832 147.21,117.832 147.324,117.718 147.94,117.718 R17.1@147.942,117.72 147.942,117.358 149.025,116.275 IC15.6@149.679,116.275 ; v1(146.257,119.656) 146.257,119.731 145.45,118.924 145.45,118 145.762,117.688 144.575,116.5 ; v1(146.55,123.1) 147.725,123.1 148,123.375 IC13.5@148,124
IN2_A: IC3.5 IC13.2 R3.2 R4.1 SW1_A.3 | length 20.1
  Power Layer w0.15: SW1_A.3@141.105,120.72 141.105,118.92 141.8,118.225 v1(146.1,118.225)
  Bottom Layer w0.15: SW1_A.3@141.105,120.72 144.62,120.72 144.98,121.08 R3.2@144.98,121.85 ; v1(146.1,118.225) 146.1,118.755 R4.1@147,119.655 147.805,119.655 148.275,120.125 148.275,121.375 148.925,122.025 IC3.5@149.679,122.025 149.7,122.046 149.7,122.85 149.5,123.05 IC13.2@149.5,124
IN2_B: IC13.4 IC15.5 R8.2 R16.1 SW1_B.3 | length 28.3
  Top Layer w0.15: v1(146.45,112.8) 148.875,115.225 v1(148.875,117.65) 148.875,119.275 151.175,121.575 151.2,121.55 v1(151.2,121.5) ; v1@148.225,123.1 149.275,123.1 150.525,124.35 v1(151.125,124.35)
  Bottom Layer w0.15: SW1_B.3@141.105,111.42 144.555,111.42 144.98,110.995 R8.2@144.98,110.35 145.675,110.35 146.125,110.8 146.125,112.5 146.425,112.8 v1(146.45,112.8) ; v1@148.225,123.1 148.5,123.375 IC13.4@148.5,124 ; v1(148.875,117.65) 148.945,117.72 R16.1@149.825,117.72 149.825,117.175 149.679,117.029 IC15.5@149.679,116.775 ; v1(151.125,124.35) 151.2,124.275 v1(151.2,121.5)
  other v1: 148.45,123.1
IN12_A: IC13.3 R6.2 | length 6.6
  Bottom Layer w0.15: R6.2@145.005,124.325 R6.2@144.98,124.35 144.98,123.545 145.975,122.55 148.725,122.55 149,122.825 IC13.3@149,124
IN12_B: IC13.6 R18.2 | length 21.4
  Top Layer w0.15: v1(143.725,119.7) 143.85,119.575 145.325,119.575 146,120.25 146,123.325 v1(146.6,123.925)
  Bottom Layer w0.15: v1(143.725,119.7) 142.525,118.5 140.425,118.5 139.65,117.725 139.65,115.725 140.2,115.175 141.85,115.175 142.4,114.625 144.125,114.625 144.98,113.77 R18.2@144.98,112.875 ; v1(146.6,123.925) 146.675,124 IC13.6@147.5,124
JTAG_VCC: D2.14 J2.1 R20.2 | length 7
  Top Layer w0.15: J2.1@157.282,116.21 159.16,116.21 159.95,117 D2.14@160.625,117 D2.14@161.875,117 161.875,116.15 161.575,115.85 160.755,115.85 R20.2@160.75,115.855
Net1V8_A_K: 1V8_A.K R3.1 | length 2.2
  Top Layer w0.15: v1(143.007,121.306) 143.094,121.306 143.65,120.75 1V8_A.K@143.702,120.75
  Bottom Layer w0.15: v1(143.007,121.306) 143.551,121.85 R3.1@144.02,121.85
Net1V8_B_K: 1V8_B.K R8.1 | length 2.2
  Top Layer w0.15: v1(143.15,110.3) 143.15,110.823 1V8_B.K@143.702,111.375
  Bottom Layer w0.15: v1(143.15,110.3) 143.2,110.35 R8.1@144.02,110.35
Net3V3_A_K: 3V3_A.K R1.1 | length 2.3
  Top Layer w0.15: v1(143.05,126.85) 143.05,126.426 3V3_A.K@143.702,125.775
  Bottom Layer w0.15: v1(143.05,126.85) 143.075,126.825 R1.1@144.02,126.825
Net3V3_B_K: 3V3_B.K R7.1 | length 2.4
  Top Layer w0.15: v1(142.975,115.525) 142.95,115.55 142.95,115.799 3V3_B.K@143.702,116.55
  Bottom Layer w0.15: v1(142.975,115.525) 143.97,115.525 R7.1@144.02,115.575
Net5V0_A_K: 5V0_A.K R6.1 | length 2.2
  Top Layer w0.15: v1(143.125,124.35) 143.125,123.839 5V0_A.K@143.702,123.262
  Bottom Layer w0.15: v1(143.125,124.35) R6.1@144.02,124.35
Net5V0_B_K: 5V0_B.K R18.1 | length 2.3
  Top Layer w0.15: v1(143.075,112.875) 143.075,113.336 5V0_B.K@143.702,113.963
  Bottom Layer w0.15: v1(143.075,112.875) R18.1@144.02,112.875
NetC3_1: C3.1 J1.1 L1.2 | length 15.1
  Top Layer w0.15: v1(131,127.5) 131,123.75 130.6,123.35 130.6,122.075 130.875,121.8 131.35,121.8 132.05,121.1 132.05,119.125 132.811,118.364 J1.1@134.29,118.364
  Bottom Layer w0.15: C3.1@130.825,124.675 131.315,125.165 L1.2@131.315,126.35 131.315,127.185 v1(131,127.5)
NetC11_1: C11.1 IC8.46 R9.2 | length 2.8
  Bottom Layer w0.15: R9.2@158.025,120.745 158.07,120.7 158.475,120.7 158.6,120.825 C11.1@159.05,120.825 159.5,120.825 159.625,120.7 IC8.46@160.75,120.7
NetC12_1: C12.1 IC8.6 | length 4.8
  Bottom Layer w0.15: IC8.6@164.777,123.227 IC8.6@164.725,123.175 164.725,124.65 165.05,124.975 165.05,125.8 165.425,126.175 166,126.175 166.175,126.35 166.175,126.875 C12.1@166.225,126.925
NetC17_2: C17.2 IC8.43 Y1.1 | length 9.2
  Bottom Layer w0.15: Y1.1@153.325,115.625 154.627,116.927 155.627,116.927 156.425,117.725 158,117.725 158,118.15 158.175,118.325 158.825,118.325 159.7,119.2 IC8.43@160.75,119.2
NetC18_2: C18.2 IC8.44 Y1.3 | length 7.3
  Bottom Layer w0.15: Y1.3@156.1,121.175 156.1,119.15 156.425,118.825 C18.2@158,118.825 158.925,118.825 159.2,119.1 159.2,119.375 159.525,119.7 IC8.44@160.75,119.7
NetIC8_2: IC8.2 R13.2 | length 2.2
  Bottom Layer w0.15: IC8.2@162.725,123.175 162.725,124.125 163.225,124.625 R13.2@163.225,125.145
NetIC8_5: IC8.5 R10.2 | length 32.4
  Top Layer w0.15: R10.2@137.525,115.645 138.945,115.645 139.5,116.2 139.5,116.98 140.695,118.175 145.152,118.175 145.677,117.65 146.525,117.65 151.875,123 160.325,123 v1@160.75,122.575
  Bottom Layer w0.15: v1@160.75,122.575 160.775,122.55 161.133,122.55 161.862,121.821 164.096,121.821 164.225,121.95 IC8.5@164.225,123.175
  other v1: 160.75,122.475
NetIC8_10: IC8.10 R23.1 | length 5.3
  Bottom Layer w0.203: IC8.10@166.725,123.175 166.725,122.404 167.058,122.071 168.221,122.071 168.625,122.475 168.625,123.55 169.155,124.08 R23.1@169.65,124.08
NetIC8_26: IC8.26 R24.1 | length 2.3
  Bottom Layer w0.15: IC8.26@167.225,114.725 167.225,113.9 167.525,113.6 168.32,113.6 R24.1@168.475,113.755
NetR2_2: R2.2 USB.K | length 2.8
  Top Layer w0.15: v1(131.25,122.425) 131.4,122.425 131.775,122.8 131.775,123.527 USB.K@131.75,123.552
  Bottom Layer w0.15: R2.2@130.909,123.571 130.909,122.666 131.15,122.425 v1(131.25,122.425)
NetR11_2: R11.2 TX_A.K | length 10.5
  Top Layer w0.15: v2(170.608,122.256) 170.606,122.256 170.575,122.225 170.575,120.975 170.849,120.701 TX_A.K@171.825,120.701
  Bottom Layer w0.15: R11.2@167.525,126.105 167.525,126.475 167.775,126.725 170.15,126.725 170.575,126.3 170.575,122.225 170.606,122.256 v2(170.608,122.256)
NetR12_2: R12.2 RX_A.K | length 7.8
  Top Layer w0.15: v1(169.825,126.1) 169.825,126.45 170.057,126.682 172.293,126.682 172.525,126.45 172.525,124.025 172.377,123.877 RX_A.K@171.825,123.877
  Bottom Layer w0.15: R12.2@168.475,126.105 168.48,126.1 v1(169.825,126.1)
NetR14_2: R14.2 TX_B.K | length 5.5
  Top Layer w0.15: v1(169.525,111.175) 171.798,111.175 TX_B.K@171.825,111.201
  Bottom Layer w0.15: R14.2@166.448,111.55 167.023,111.55 167.373,111.2 169.5,111.2 v1(169.525,111.175)
NetR15_2: R15.2 RX_B.K | length 8.7
  Top Layer w0.15: v1(167.1,110.725) 167.8,110.725 170.1,113.025 170.1,113.927 170.625,114.452 RX_B.K@171.825,114.452
  Bottom Layer w0.15: R15.2@165.573,111.55 165.573,111.544 166.392,110.725 v1(167.1,110.725)
SHIELD: J1.S L2.2 | length 17.4
  Bottom Layer w0.254: L2.2@130.585,111.275 J1.S@130.585,113.094 ; J1.S@134.29,113.339 132.264,113.339 132,113.075 130.604,113.075 J1.S@130.585,113.094 ; J1.S@134.29,120.789 130.64,120.789 J1.S@130.49,120.939 J1.S@130.49,113.189 J1.S@130.585,113.094
UART_1_CTS: D2.13 IC5.4 IC8.21 J2.2 | length 35.6
  Top Layer w0.15: J2.2@153.218,116.21 154.985,116.21 155.6,116.825 158.95,116.825 159.625,117.5 D2.13@160.625,117.5 162.325,117.5 162.7,117.125 v1(163.45,117.125) v1@163.325,117
  Bottom Layer w0.15: v1(163.45,117.125) 163.2,117.125 162.293,118.032 162.293,120.493 162.782,120.982 163.868,120.982 164.173,120.677 164.173,119.299 165.772,117.7 IC8.21@169.2,117.7 170.225,117.7 170.975,118.45 172.775,118.45 173.126,118.099 173.126,112.151 172.818,111.843 IC5.4@172.308,111.843
UART_1_CTS_T: IC5.2 J3.7 | length 9.7
  Bottom Layer w0.15: IC5.2@174.508,112.493 175.15,112.493 176.007,113.35 176.7,113.35 177.427,114.077 177.427,118.628 J3.7@176.325,119.73
UART_1_OE: IC4.1 IC5.1 IC6.1 IC7.1 R19.2 R20.1 | length 39.7
  Top Layer w0.15: v1(159.05,114.275) v1@159.125,114.35 ; v1@159.125,114.275 160.45,114.275 160.75,114.575 R20.1@160.75,114.895
  Top Layer w0.254: v2(172.536,115.113) 172.536,113.896 v1@173.6,112.832
  Power Layer w0.254: v1(159.05,114.275) 168.546,114.275 169.596,115.325 v1(169.625,115.325) 170.9,115.325 ; v2(172.536,115.113) 171.562,115.113 171.35,115.325 170.9,115.325 ; v1(173.475,120.375) 173.475,119.425 172.3,118.25 172.3,116.725 170.9,115.325
  Bottom Layer w0.254: R19.2@158.07,115.175 158.07,114.53 158.325,114.275 v1(159.05,114.275) ; v1(169.625,115.325) 169.784,115.325 170.643,116.184 171.107,116.184 171.116,116.175 171.275,116.175 171.725,116.625 IC7.1@172.258,116.625 ; IC6.1@172.258,124.353 172.803,124.353 173.35,124.9 174.87,124.9 175.171,124.599 175.171,124.332 175.443,124.06 175.443,123.574 174.962,123.094 174.962,121.658 174.508,121.204 IC4.1@174.508,120.871 173.971,120.871 v1(173.475,120.375) ; v1@173.6,112.832 173.864,113.097 174.462,113.097 IC5.1@174.508,113.143
  other v1: 173.633,112.832
UART_1_RTS: D2.11 IC7.2 IC8.22 J2.6 | length 23.3
  Top Layer w0.15: J2.6@153.218,118.75 154.75,118.75 155.375,119.375 158.775,119.375 159.65,118.5 D2.11@160.625,118.5 163.025,118.5 163.475,118.95 163.475,120.425 v1(163.425,120.475)
  Bottom Layer w0.15: v1(163.425,120.475) 163.475,120.425 163.475,119.606 165.881,117.2 IC8.22@169.2,117.2 169.3,117.3 172.233,117.3 IC7.2@172.258,117.275